# Altium PCB PCB1.PcbDoc
Units mil, origin at the board's own origin, x right, y up, seen from the top; angles counter-clockwise.
Board outline 7009 x 4064 mil, 2 copper layers (Top Layer, Bottom Layer), stack 60.4 mil thick; 110 components, 214 nets, 706 pads, 0 vias.
Unrouted connection lines stored in the file: 459.
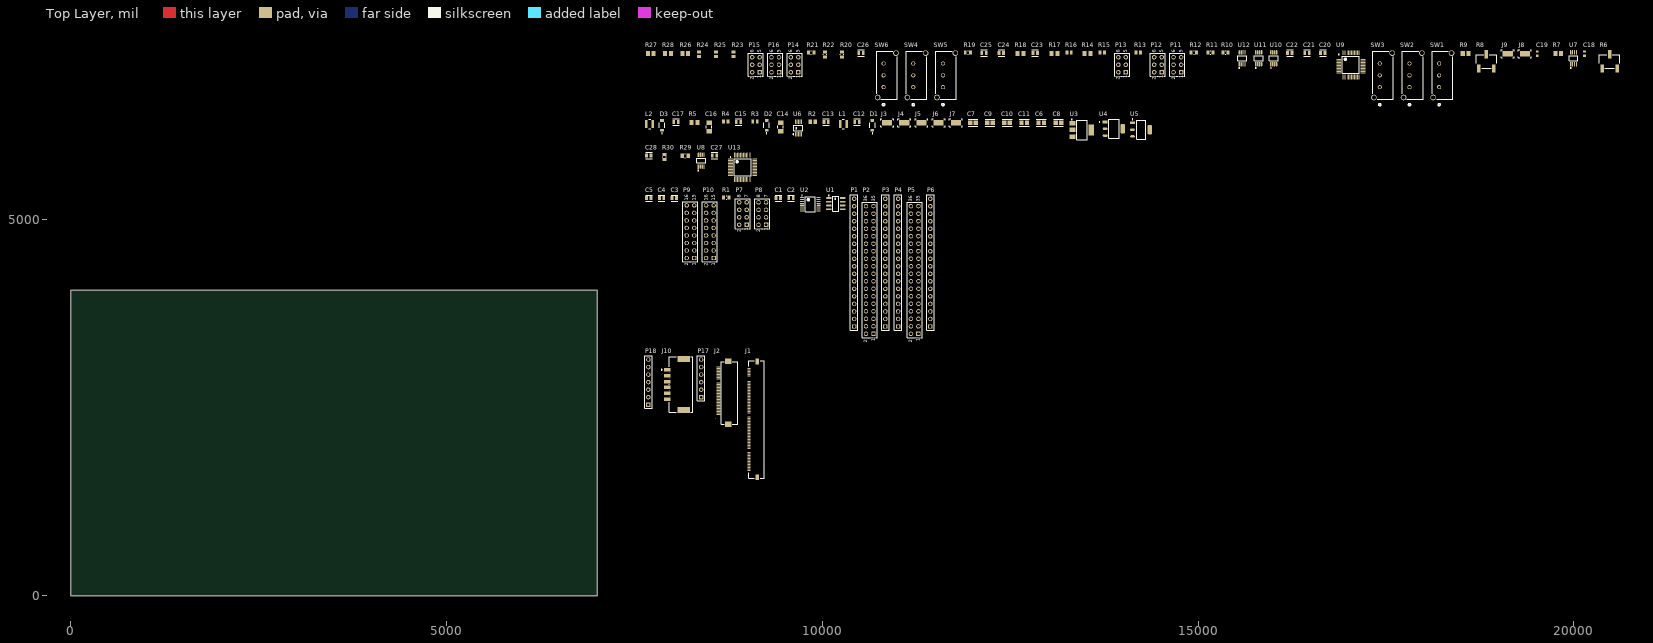
[diagram p0: Top Layer view]
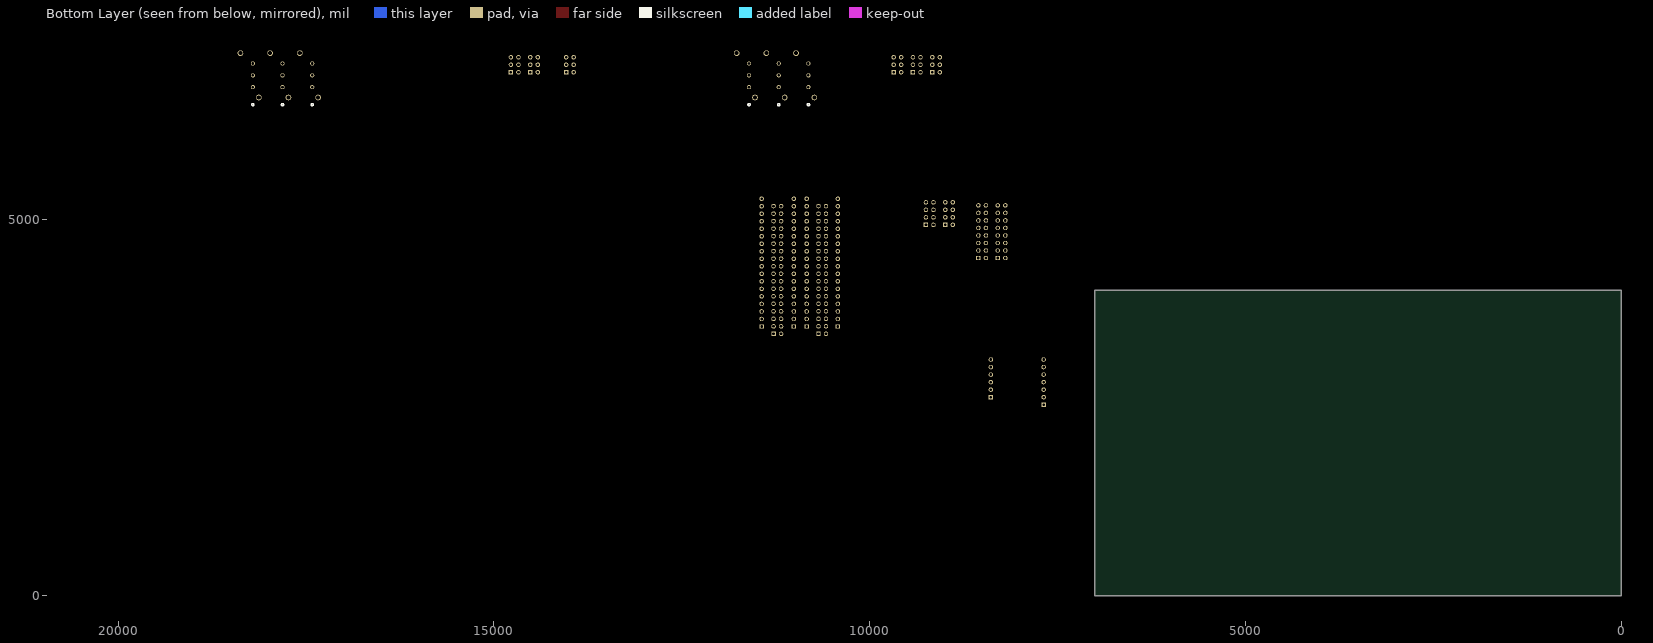
[diagram p1: Bottom Layer view, seen from below]

## Layer stack, top to bottom
Top Solder: solder mask 0.5, Solder Resist, Dk 3.3
Top Layer: signal copper 0.7
Dielectric1: core 59, FR-4, Dk 4.3
Bottom Layer: signal copper 0.7
Bottom Solder: solder mask 0.5, Solder Resist, Dk 3.3

## Board outline
0,0 7009,0 7009,4064 0,4064

## Design rules (kind name [scope] priority, off if disabled: settings)
Clearance [All] p1: gap=10 ignorepadtopadclearanceinfootprint=FALSE
DiffPairsRouting [All] p1: maxlimit=10 minlimit=10 mostfreqgap=10 toplayer_minwidth=10 toplayer_maxwidth=10 toplayer_prefwidth=10 bottomlayer_minwidth=10 bottomlayer_maxwidth=10 bottomlayer_prefwidth=10 maxuncoupledlength=500
HoleSize [All] p1: absolutevalues=TRUE maxlimit=300 minlimit=10 maxpercent=80.000 minpercent=20.000
MinimumAnnularRing [All] p1: minimumring=10
PasteMaskExpansion [All] p1: expansion=10
PlaneClearance [All] p1: clearance=15
PlaneConnect [All] p1: pad.planeconnectstyle=Relief pad.reliefexpansion=20 pad.reliefentries=4 pad.reliefconductorwidth=10 pad.reliefairgap=10 via.planeconnectstyle=Direct via.reliefexpansion=20 via.reliefentries=4 via.reliefconductorwidth=10 via.reliefairgap=10
PolygonConnect [All] p1: thpad.connectstyle=Relief thpad.reliefconductorwidth=10 thpad.reliefentries=4 thpad.polygonreliefangle="90 Angle" thpad.airgapwidth=10 smdpad.connectstyle=Relief smdpad.reliefconductorwidth=10 smdpad.reliefentries=4 smdpad.polygonreliefangle="90 Angle" smdpad.airgapwidth=10 via.connectstyle=Direct via.reliefconductorwidth=10 via.reliefentries=4 via.polygonreliefangle="90 Angle" via.airgapwidth=10
RoomDefinition U_Transmit [InComponentClass('U_Transmit')] p1: confinementstyle=ConfineIn formatcopy=TRUE lockcomponents=FALSE outline 7627,6505 20625,6505 20625,7373 7627,7373
RoomDefinition U_Power [InComponentClass('U_Power')] p2: confinementstyle=ConfineIn formatcopy=TRUE lockcomponents=FALSE outline 7627,6060 14402,6060 14402,6455 7627,6455
RoomDefinition U_Measure [InComponentClass('U_Measure')] p3: confinementstyle=ConfineIn formatcopy=TRUE lockcomponents=FALSE outline 7627,5492 9149,5492 9149,6010 7627,6010
RoomDefinition U_ESP32+ADC+DAC [InComponentClass('U_ESP32+ADC+DAC')] p4: confinementstyle=ConfineIn formatcopy=TRUE lockcomponents=FALSE outline 7627,3352 11510,3352 11510,5442 7627,5442
RoomDefinition U_Connectors [InComponentClass('U_Connectors')] p5: confinementstyle=ConfineIn formatcopy=TRUE lockcomponents=FALSE outline 7627,1490 9277,1490 9277,3302 7627,3302
RoutingVias [All] p1: holewidth=10 width=20 viastyle="Through Hole" minholewidth=10 minwidth=20 maxholewidth=10 maxwidth=20
SMDNeckDown [All] p1: percent=100.000
SilkToSolderMaskClearance SilkscreenOverComponentPads [IsPad] p1: minsilkscreentomaskgap=10 clearancetoexposedcopper=TRUE
SolderMaskExpansion [All] p1: expansion=10 istentingtop=FALSE
Width [All] p1: maxlimit=10 minlimit=10 preferedwidth=10
24 further rules are at their usual default settings.

## Classes and differential pairs
net class VGS_RAW[1..6]: VGS_RAW1 VGS_RAW2 VGS_RAW3 VGS_RAW4 VGS_RAW5 VGS_RAW6
net class VDS[1..32]: VDS1 VDS2 VDS3 VDS4 VDS5 VDS6 VDS7 VDS8 VDS9 VDS10 VDS11 VDS12 VDS13 VDS14 VDS15 VDS16 VDS17 VDS18 VDS19 VDS20 VDS21 VDS22 VDS23 VDS24 VDS25 VDS26 VDS27 VDS28 VDS29 VDS30 VDS31 VDS32
net class SOURCE_SEL[0..4]: SOURCE_SEL0 SOURCE_SEL1 SOURCE_SEL2 SOURCE_SEL3 SOURCE_SEL4
net class IDS[1..32]: IDS1 IDS2 IDS3 IDS4 IDS5 IDS6 IDS7 IDS8 IDS9 IDS10 IDS11 IDS12 IDS13 IDS14 IDS15 IDS16 IDS17 IDS18 IDS19 IDS20 IDS21 IDS22 IDS23 IDS24 IDS25 IDS26 IDS27 IDS28 IDS29 IDS30 IDS31 IDS32
net class GATE[1..6]: GATE1 GATE2 GATE3 GATE4 GATE5 GATE6
net class DRAIN_SEL[0..4]: DRAIN_SEL0 DRAIN_SEL1 DRAIN_SEL2 DRAIN_SEL3 DRAIN_SEL4
component class U_Transmit: C18 C19 C20 C21 C22 C23 C24 C25 C26 J8 J9 P11 P12 P13 P14 P15 P16 R6 R7 R8 R9 R10 R11 R12 R13 R14 R15 R16 R17 R18 R19 R20 R21 R22 R23 R24 R25 R26 R27 R28 SW1 SW2 SW3 SW4 SW5 SW6 U7 U9 U10 U11 U12
component class U_Power: C6 C7 C8 C9 C10 C11 C12 C13 C14 C15 C16 C17 D1 D2 D3 J3 J4 J5 J6 J7 L1 L2 R2 R3 R4 R5 U3 U4 U5 U6
component class U_Measure: C27 C28 R29 R30 U8 U13
component class U_ESP32+ADC+DAC: C1 C2 C3 C4 C5 P1 P2 P3 P4 P5 P6 P7 P8 P9 P10 R1 U1 U2
component class U_Connectors: J1 J2 J10 P17 P18

## Components (designator, comment, footprint, x,y, rotation, side; value= is the part's Value field where it differs from the comment)
C1 "100 nF" FP-C0805C-DN-MFG 9415,5290 r0 top value="0.10 μF"
C2 "100 nF" FP-C0805C-DN-MFG 9584,5290 r0 top value="0.10 μF"
C3 "100 nF" FP-C0805C-DN-MFG 8032,5290 r0 top value="0.10 μF"
C4 "100 nF" FP-C0805C-DN-MFG 7862,5290 r0 top value="0.10 μF"
C5 "100 nF" FP-C0805C-DN-MFG 7692,5290 r0 top value="0.10 μF"
C6 "10 uF" FP-CL21-IPC_A 12915,6295 r0 top
C7 "10 uF" FP-CL21-IPC_A 12005,6295 r0 top
C8 "10 uF" FP-CL21-IPC_A 13143,6295 r0 top
C9 "10 uF" FP-CL21-IPC_A 12233,6295 r0 top
C10 "10 uF" FP-CL21-IPC_A 12460,6295 r0 top
C11 "10 uF" FP-CL21-IPC_A 12688,6295 r0 top
C12 "100 nF" FP-C0805C-DN-MFG 10463,6303 r0 top value="0.10 μF"
C13 "100 pF" FP-C0805C-DN-MFG 10051,6303 r0 top
C14 "1uF" FP-1206-L_3_2_0_15-W_1_6-IPC_A 9446,6238 r90 top
C15 "4.7 uF" FP-C0805C475K3PACTU-MFG 8885,6302 r0 top
C16 "1uF" FP-1206-L_3_2_0_15-W_1_6-IPC_A 8496,6238 r90 top
C17 "100 pF" FP-C0805C-DN-MFG 8054,6303 r0 top
C18 "100 nF" 1608[0603] 20142,7214 r90 top
C19 "100 nF" 1608[0603] 19516,7214 r90 top
C20 "100 nF" FP-C0805C-DN-MFG 16661,7221 r0 top value="0.10 μF"
C21 "100 nF" FP-C0805C-DN-MFG 16451,7221 r0 top value="0.10 μF"
C22 "100 nF" FP-C0805C-DN-MFG 16221,7221 r0 top value="0.10 μF"
C23 "100 nF" FP-C0805C-DN-MFG 12833,7221 r0 top value="0.10 μF"
C24 "100 nF" FP-C0805C-DN-MFG 12382,7221 r0 top value="0.10 μF"
C25 "100 nF" FP-C0805C-DN-MFG 12152,7221 r0 top value="0.10 μF"
C26 "100 nF" FP-C0805C-DN-MFG 10516,7221 r0 top value="0.10 μF"
C27 "100 nF" FP-C0805C-DN-MFG 8566,5858 r0 top value="0.10 μF"
C28 "100 nF" FP-C0805C-DN-MFG 7692,5858 r0 top value="0.10 μF"
D1 "MBR0530" FP-425-04-MFG 10667,6259 r90 top
D2 "MBR0530" FP-425-04-MFG 9259,6259 r90 top
D3 "MBR0530" FP-425-04-MFG 7868,6259 r90 top
J1 "5051107091" 5051107091 9134,2346 r90 top
J2 "FH12-36S-0.5SH_55_" FH1236S05SH55 8749,2700 r90 top
J3 "5015" FP-5015-MFG 10863,6293 r0 top
J4 "5015" FP-5015-MFG 11091,6293 r0 top
J5 "5015" FP-5015-MFG 11320,6293 r0 top
J6 "5015" FP-5015-MFG 11549,6293 r0 top
J7 "5015" FP-5015-MFG 11778,6293 r0 top
J8 "5015" FP-5015-MFG 19349,7211 r0 top
J9 "5015" FP-5015-MFG 19121,7211 r0 top
J10 "5600200620" FP-5600200620-MFG 8119,2811 r90 top
L1 "LQH3NPN100MMEL" FP-LQH3NPH_ME-MFG 10282,6279 r0 top
L2 "LQH3NPN100MMEL" FP-LQH3NPH_ME-MFG 7703,6279 r0 top
P1 "Header 18" HDR1X18 10424,3583 r90 top
P2 "Header 18X2" HDR2X18 10682,3485 r90 top
P3 "Header 18" HDR1X18 10839,3583 r90 top
P4 "Header 18" HDR1X18 11010,3583 r90 top
P5 "Header 18X2" HDR2X18 11280,3485 r90 top
P6 "Header 18" HDR1X18 11438,3583 r90 top
P7 "Header 4X2" HDR2X4 8994,4935 r90 top
P8 "Header 4X2" HDR2X4 9252,4935 r90 top
P9 "Header 8X2" HDR2X8 8296,4494 r90 top
P10 "Header 8X2" HDR2X8 8554,4494 r90 top
P11 "Header 3X2" HDR2X3 14775,6966 r90 top
P12 "Header 3X2" HDR2X3 14517,6966 r90 top
P13 "Header 3X2" HDR2X3 14040,6966 r90 top
P14 "Header 3X2" HDR2X3 9682,6966 r90 top
P15 "Header 3X2" HDR2X3 9167,6966 r90 top
P16 "Header 3X2" HDR2X3 9425,6966 r90 top
P17 "Header 6" HDR1X6 8388,2643 r90 top
P18 "Header 7" HDR1X7 7686,2543 r90 top
R1 "10k" RESC2013X60X35NL10T20 8724,5298 r0 top
R2 "365k" RESC2013X70X40NL20T20 9874,6309 r0 top
R3 "24.9k" RESC2013X70X40LL20T20 9105,6313 r0 top
R4 "24.9k" RESC2013X70X40LL20T20 8715,6313 r0 top
R5 "380k" RESC2013X70X40ML20T20 8300,6297 r0 top
R6 "3269W-1-104LF" FP-3269W-MFG 20477,7110 r0 top value=100kΩ
R7 "12k" RESC2013X60X40ML20T25 19794,7215 r0 top
R8 "3269W-1-104LF" FP-3269W-MFG 18838,7110 r0 top value=100kΩ
R9 "12k" RESC2013X60X40ML20T25 18560,7215 r0 top
R10 "10k" RESC2013X60X35NL10T20 15366,7229 r0 top
R11 "10k" RESC2013X60X35NL10T20 15166,7229 r0 top
R12 "10k" RESC2013X60X35NL10T20 14945,7229 r0 top
R13 "91k" RESC2013X60X40LL20T25 14203,7231 r0 top
R14 "191k" RESC2013X70X40ML20T20 13530,7215 r0 top
R15 "91k" RESC2013X60X40LL20T25 13725,7231 r0 top
R16 "91k" RESC2013X60X40LL20T25 13284,7231 r0 top
R17 "191k" RESC2013X70X40ML20T20 13089,7215 r0 top
R18 "191k" RESC2013X70X40ML20T20 12638,7215 r0 top
R19 "10k" RESC2013X60X35NL10T20 11938,7229 r0 top
R20 "10k" RESC2013X60X35NL10T20 10265,7202 r90 top
R21 "10k" RESC2013X60X35NL10T20 9852,7229 r0 top
R22 "10k" RESC2013X60X35NL10T20 10035,7202 r90 top
R23 "91k" RESC2013X60X40LL20T25 8819,7208 r90 top
R24 "91k" RESC2013X60X40LL20T25 8359,7208 r90 top
R25 "91k" RESC2013X60X40LL20T25 8589,7208 r90 top
R26 "191k" RESC2013X70X40ML20T20 8178,7215 r0 top
R27 "191k" RESC2013X70X40ML20T20 7718,7215 r0 top
R28 "191k" RESC2013X70X40ML20T20 7948,7215 r0 top
R29 "1k" RESC2013X60X35ML10T20 8176,5854 r0 top
R30 "10k" RESC2013X60X35NL10T20 7901,5839 r90 top
SW1 "1825255-1" SW3_1825255-1_TEC 18209,6768 r90 top
SW2 "1825255-1" SW3_1825255-1_TEC 17814,6768 r90 top
SW3 "1825255-1" SW3_1825255-1_TEC 17419,6768 r90 top
SW4 "1825255-1" SW3_1825255-1_TEC 11211,6768 r90 top
SW5 "1825255-1" SW3_1825255-1_TEC 11606,6768 r90 top
SW6 "1825255-1" SW3_1825255-1_TEC 10816,6768 r90 top
U1 "MCP3201-CI/SN" SOIC-SN8_L 10180,5218 r0 top
U2 "AD5328BRUZ" RU-16_L 9842,5209 r0 top
U3 "NCP1117ST20T3G" ONSC-SOT-223-4-318H-01_A_V 13455,6198 r0 top
U4 "LDL1117S33R" FP-SOT223-0046067-IPC_C 13882,6214 r0 top
U5 "AP7365-10EG-13" FP-SOT223-IPC_C 14243,6202 r0 top
U6 "LT1945EMS#PBF" LT-MS-10_N 9682,6224 r90 top
U7 "ADA4522-2ARMZ" FP-RM-8-IPC_C 19997,7152 r90 top
U8 "ADA4522-2ARMZ" FP-RM-8-IPC_C 8389,5789 r90 top
U9 "ADG732BSUZ-REEL" ADI-SU-48_N 17035,7064 r0 top
U10 "ADA4522-2ARMZ" FP-RM-8-IPC_C 16008,7152 r90 top
U11 "ADA4522-2ARMZ" FP-RM-8-IPC_C 15808,7152 r90 top
U12 "ADA4522-2ARMZ" FP-RM-8-IPC_C 15587,7152 r90 top
U13 "ADG732BSUZ-REEL" ADI-SU-48_N 8940,5701 r0 top

## Footprints (in the part's own frame and the unit in brackets; to place one, negate y for a bottom-side part, rotate by r counter-clockwise, add the part's x,y. Pads: shape width x height; smd on the part's side, far side on the other; paste and mask are expansions set on the pad)
1608[0603] [mm] "Chip Capacitor, Body 1.6x0.8mm, IPC High Density"
  rect 0.8x0.9 smd: 1(-0.7,0) 2(0.7,0)
  body extent -0.87,-0.48 0.87,0.48, height 1.3
5051107091 [mm]
  rect 0.3x1 smd: 1(-17.25,2.7) 2(-16.75,2.7) 3(-16.25,2.7) 4(-15.75,2.7) 5(-15.25,2.7) 6(-14.75,2.7) 7(-14.25,2.7) 8(-13.75,2.7) 9(-13.25,2.7) 10(-12.75,2.7) 11(-12.25,2.7) 12(-11.75,2.7) 13(-11.25,2.7) 14(-10.75,2.7) 15(-10.25,2.7) 16(-9.75,2.7) 17(-9.25,2.7) 18(-8.75,2.7) 19(-8.25,2.7) 20(-7.75,2.7) 21(-7.25,2.7) 22(-6.75,2.7) 23(-6.25,2.7) 24(-5.75,2.7) 25(-5.25,2.7) 26(-4.75,2.7) 27(-4.25,2.7) 28(-3.75,2.7) 29(-3.25,2.7) 30(-2.75,2.7) 31(-2.25,2.7) 32(-1.75,2.7) 33(-1.25,2.7) 34(-0.75,2.7) 35(-0.25,2.7) 36(0.25,2.7) 37(0.75,2.7) 38(1.25,2.7) 39(1.75,2.7) 40(2.25,2.7) 41(2.75,2.7) 42(3.25,2.7) 43(3.75,2.7) 44(4.25,2.7) 45(4.75,2.7) 46(5.25,2.7) 47(5.75,2.7) 48(6.25,2.7) 49(6.75,2.7) 50(7.25,2.7) 51(7.75,2.7) 52(8.25,2.7) 53(8.75,2.7) 54(9.25,2.7) 55(9.75,2.7) 56(10.25,2.7) 57(10.75,2.7) 58(11.25,2.7) 59(11.75,2.7) 60(12.25,2.7) 61(12.75,2.7) 62(13.25,2.7) 63(13.75,2.7) 64(14.25,2.7) 65(14.75,2.7) 66(15.25,2.7) 67(15.75,2.7) 68(16.25,2.7) 69(16.75,2.7) 70(17.25,2.7)
  rect 2x1.3 smd: 71(-19.55,0) 72(19.55,0)
  silkscreen extent -19.85,-2.45 19.85,2.8, body extent -20.25,-2.33 20.25,2.97, height 1.88
ADI-SU-48_N [mm] "QFP, 48-Leads, Body 7x7mm, Pitch 0.5mm, IPC Medium Density"
  oval 1.65x0.3 smd: 1(-4.1,2.75) 2(-4.1,2.25) 3(-4.1,1.75) 4(-4.1,1.25) 5(-4.1,0.75) 6(-4.1,0.25) 7(-4.1,-0.25) 8(-4.1,-0.75) 9(-4.1,-1.25) 10(-4.1,-1.75) 11(-4.1,-2.25) 12(-4.1,-2.75) 25(4.1,-2.75) 26(4.1,-2.25) 27(4.1,-1.75) 28(4.1,-1.25) 29(4.1,-0.75) 30(4.1,-0.25) 31(4.1,0.25) 32(4.1,0.75) 33(4.1,1.25) 34(4.1,1.75) 35(4.1,2.25) 36(4.1,2.75)
  oval 0.3x1.65 smd: 13(-2.75,-4.1) 14(-2.25,-4.1) 15(-1.75,-4.1) 16(-1.25,-4.1) 17(-0.75,-4.1) 18(-0.25,-4.1) 19(0.25,-4.1) 20(0.75,-4.1) 21(1.25,-4.1) 22(1.75,-4.1) 23(2.25,-4.1) 24(2.75,-4.1) 37(2.75,4.1) 38(2.25,4.1) 39(1.75,4.1) 40(1.25,4.1) 41(0.75,4.1) 42(0.25,4.1) 43(-0.25,4.1) 44(-0.75,4.1) 45(-1.25,4.1) 46(-1.75,4.1) 47(-2.25,4.1) 48(-2.75,4.1)
  silkscreen extent -4.22,-2.88 2.88,3.57, body extent -3.5,-3.5 3.5,3.5, height 1.2
FH1236S05SH55 [mm]
  rect 0.3x1.3 smd: 1(-8.75,3.25) 2(-8.25,3.25) 3(-7.75,3.25) 4(-7.25,3.25) 5(-6.75,3.25) 6(-6.25,3.25) 7(-5.75,3.25) 8(-5.25,3.25) 9(-4.75,3.25) 10(-4.25,3.25) 11(-3.75,3.25) 12(-3.25,3.25) 13(-2.75,3.25) 14(-2.25,3.25) 15(-1.75,3.25) 16(-1.25,3.25) 17(-0.75,3.25) 18(-0.25,3.25) 19(0.25,3.25) 20(0.75,3.25) 21(1.25,3.25) 22(1.75,3.25) 23(2.25,3.25) 24(2.75,3.25) 25(3.25,3.25) 26(3.75,3.25) 27(4.25,3.25) 28(4.75,3.25) 29(5.25,3.25) 30(5.75,3.25) 31(6.25,3.25) 32(6.75,3.25) 33(7.25,3.25) 34(7.75,3.25) 35(8.25,3.25) 36(8.75,3.25)
  rect 1.8x2.2 smd: MP1(-10.65,0) MP2(10.65,0)
  silkscreen extent -10.55,-3.2 10.55,4.45
FP-425-04-MFG [mil]
  rect 36x48 smd paste+0 mask+0: 1(-64.5,0) 2(64.5,0)
  silkscreen extent -110,-35 32,35, body extent -86,-39 86,39, height 10
FP-1206-L_3_2_0_15-W_1_6-IPC_A [mil]
  rect 61.24x73.16 smd paste+0 mask+0: 1(-57.14,0) 2(57.14,0)
  silkscreen extent -15,-37 15,37, body extent -107,-56 107,56, height 10
FP-3269W-MFG [mm]
  rect 1.19x2.79 smd paste+0 mask+0: 1(-2.54,-2.415) 2(0,2.415) 3(2.54,-2.415)
  silkscreen extent -3.43,-2.28 3.43,2.28, body extent -3.53,-3.91 3.53,3.91, height 0.25
FP-5015-MFG [mm]
  rect 3.43x1.78 smd paste+0 mask+0: 1(0,0)
  silkscreen extent -2.16,-1.34 2.17,1.34
FP-5600200620-MFG [mm]
  rect 1.2x2.2 smd paste+0 mask+0: 1(5,4.68) 2(3,4.68) 3(1,4.68) 4(-1,4.68) 5(-3,4.68) 6(-5,4.68)
  rect 2x4.2 smd paste+0 mask+0: 7(-8.6,-0.9) 8(8.6,-0.9)
  silkscreen extent -9.43,-4 9.43,6.63, body extent -9.7,-4.1 9.7,5.88, height 0.25
FP-C0805C475K3PACTU-MFG [mm]
  rect 0.95x1.35 smd paste+0 mask+0: 1(-0.75,0) 2(0.75,0)
  silkscreen extent -1.1,-1.1 1.1,1.1, body extent -1.4,-0.85 1.4,0.85, height 0.25
FP-C0805C-DN-MFG [mm]
  rect 0.95x1.35 smd paste+0 mask+0: 1(-0.75,0) 2(0.75,0)
  silkscreen extent -1.1,-1.07 1.1,1.07, body extent -1.4,-0.85 1.4,0.85, height 0.25
FP-CL21-IPC_A [mil]
  rect 57.27x61.27 smd paste+0 mask+0: 1(-36.45,0) 2(36.45,0)
  silkscreen extent -65,-46 65,46, body extent -85,-50 85,50, height 10
FP-LQH3NPH_ME-MFG [mm]
  rect 0.8x2.7 smd paste+0 mask+0: 1(-1.1,0) 2(1.1,0)
  silkscreen extent -0.33,-1.6 0.33,1.6, body extent -1.7,-1.7 1.7,1.7, height 0.25
FP-RM-8-IPC_C [mm]
  rect 1.454x0.436 smd paste+0 mask+0: 1(-2,0.975)
  rrect100% 1.454x0.436 smd paste+0 mask+0: 2(-2,0.325) 3(-2,-0.325) 4(-2,-0.975) 5(2,-0.975) 6(2,-0.325) 7(2,0.325) 8(2,0.975)
  silkscreen extent -3.43,-1.5 0.77,1.5
FP-SOT223-0046067-IPC_C [mm]
  rect 1.604x0.88 smd paste+0 mask+0: 1(-3,2.3)
  rrect100% 1.604x0.88 smd paste+0 mask+0: 2(-3,0) 3(-3,-2.3)
  rrect55% 1.604x3.18 smd paste+0 mask+0: 4(3,0)
  silkscreen extent -5.05,-3.25 1.75,3.25, body extent -3.9,-3.35 3.9,3.35, height 0.25
FP-SOT223-IPC_C [mm]
  rect 1.56x0.832 smd paste+0 mask+0: 1(-2.926,2.3)
  rrect100% 1.56x0.832 smd paste+0 mask+0: 2(-2.926,0) 3(-2.926,-2.3)
  rrect53% 1.56x3.132 smd paste+0 mask+0: 4(2.926,0)
  silkscreen extent -3.05,-3.25 1.5,3.62, body extent -3.81,-3.35 3.81,3.35, height 0.25
HDR1X6 [mm] "Connector; Header; 6 Position"
  rect 1.5x1.5 hole 0.9: 1(0,0)
  round 1.5 hole 0.9: 2(2.54,0) 3(5.08,0) 4(7.62,0) 5(10.16,0) 6(12.7,0)
  silkscreen extent -1.27,-1.27 13.97,1.27
HDR1X7 [mm] "Connector; Header; 7 Position"
  rect 1.5x1.5 hole 0.9: 1(0,0)
  round 1.5 hole 0.9: 2(2.54,0) 3(5.08,0) 4(7.62,0) 5(10.16,0) 6(12.7,0) 7(15.24,0)
  silkscreen extent -1.27,-1.27 16.51,1.27
HDR1X18 [mm] "Connector; Header; 18 Position"
  rect 1.5x1.5 hole 0.9: 1(0,0)
  round 1.5 hole 0.9: 2(2.54,0) 3(5.08,0) 4(7.62,0) 5(10.16,0) 6(12.7,0) 7(15.24,0) 8(17.78,0) 9(20.32,0) 10(22.86,0) 11(25.4,0) 12(27.94,0) 13(30.48,0) 14(33.02,0) 15(35.56,0) 16(38.1,0) 17(40.64,0) 18(43.18,0)
  silkscreen extent -1.27,-1.27 44.45,1.27
HDR2X3 [mm] "Connector; Header; 3x2 Position"
  rect 1.5x1.5 hole 0.9: 1(0,0)
  round 1.5 hole 0.9: 2(0,2.54) 3(2.54,0) 4(2.54,2.54) 5(5.08,0) 6(5.08,2.54)
  silkscreen extent -1.27,-1.27 6.35,3.81
HDR2X4 [mm] "Connector; Header; 4x2 Position"
  rect 1.5x1.5 hole 0.9: 1(0,0)
  round 1.5 hole 0.9: 2(0,2.54) 3(2.54,0) 4(2.54,2.54) 5(5.08,0) 6(5.08,2.54) 7(7.62,0) 8(7.62,2.54)
  silkscreen extent -1.27,-1.27 8.89,3.81
HDR2X8 [mm] "Connector; Header; 8x2 Position"
  rect 1.5x1.5 hole 0.9: 1(0,0)
  round 1.5 hole 0.9: 2(0,2.54) 3(2.54,0) 4(2.54,2.54) 5(5.08,0) 6(5.08,2.54) 7(7.62,0) 8(7.62,2.54) 9(10.16,0) 10(10.16,2.54) 11(12.7,0) 12(12.7,2.54) 13(15.24,0) 14(15.24,2.54) 15(17.78,0) 16(17.78,2.54)
  silkscreen extent -1.27,-1.27 19.05,3.81
HDR2X18 [mm] "Connector; Header; 18x2 Position"
  rect 1.5x1.5 hole 0.9: 1(0,0)
  round 1.5 hole 0.9: 2(0,2.54) 3(2.54,0) 4(2.54,2.54) 5(5.08,0) 6(5.08,2.54) 7(7.62,0) 8(7.62,2.54) 9(10.16,0) 10(10.16,2.54) 11(12.7,0) 12(12.7,2.54) 13(15.24,0) 14(15.24,2.54) 15(17.78,0) 16(17.78,2.54) 17(20.32,0) 18(20.32,2.54) 19(22.86,0) 20(22.86,2.54) 21(25.4,0) 22(25.4,2.54) 23(27.94,0) 24(27.94,2.54) 25(30.48,0) 26(30.48,2.54) 27(33.02,0) 28(33.02,2.54) 29(35.56,0) 30(35.56,2.54) 31(38.1,0) 32(38.1,2.54) 33(40.64,0) 34(40.64,2.54) 35(43.18,0) 36(43.18,2.54)
  silkscreen extent -1.27,-1.27 44.45,3.81
LT-MS-10_N [mm] "SOP, 10-Leads, Body 3.1x3.1mm, Pitch 0.5mm, IPC Medium Density"
  oval 1.6x0.3 smd: 1(-2.125,1) 2(-2.125,0.5) 3(-2.125,0) 4(-2.125,-0.5) 5(-2.125,-1) 6(2.125,-1) 7(2.125,-0.5) 8(2.125,0) 9(2.125,0.5) 10(2.125,1)
  silkscreen extent -2.25,-1.55 0.92,1.82, body extent -1.55,-1.55 1.55,1.55, height 1.1
ONSC-SOT-223-4-318H-01_A_V [mm] "SOT223, 4-Leads, Body 6.5x3.5mm, Pitch 2.3mm"
  rect 2x1.5 smd: 1(-3.15,2.3) 2(-3.15,0) 3(-3.15,-2.3)
  rect 2x3.8 smd: 4(3.15,0)
  silkscreen extent -3.55,-3.25 1.75,3.72, body extent -1.75,-3.25 1.75,3.25, height 1.8
RESC2013X60X35ML10T20 [mm] "Chip Resistor, 2-Leads, Body 2.1x1.35mm, IPC Low Density"
  rect 1.2x1.45 smd: 1(-1,0) 2(1,0)
  silkscreen extent -0.1,-0.63 0.1,0.63, body extent -1.05,-0.68 1.05,0.67, height 0.6
RESC2013X60X35NL10T20 [mm] "Chip Resistor, 2-Leads, Body 2.1x1.35mm, IPC Medium Density"
  rect 1x1.35 smd: 1(-0.9,0) 2(0.9,0)
  silkscreen extent -0.1,-0.58 0.1,0.58, body extent -1.05,-0.68 1.05,0.67, height 0.6
RESC2013X60X40LL20T25 [mm] "Chip Resistor, 2-Leads, Body 2.00x1.25mm, IPC High Density"
  rect 1x1.35 smd: 1(-0.75,0) 2(0.75,0)
  body extent -1.1,-0.72 1.1,0.72, height 0.6
RESC2013X60X40ML20T25 [mm] "Chip Resistor, 2-Leads, Body 2.00x1.25mm, IPC Low Density"
  rect 1.4x1.55 smd: 1(-0.95,0) 2(0.95,0)
  body extent -1.1,-0.72 1.1,0.72, height 0.6
RESC2013X70X40LL20T20 [mm] "Chip Resistor, 2-Leads, Body 2.00x1.25mm, IPC High Density"
  rect 0.95x1.35 smd: 1(-0.775,0) 2(0.775,0)
  body extent -1.1,-0.72 1.1,0.72, height 0.7
RESC2013X70X40ML20T20 [mm] "Chip Resistor, 2-Leads, Body 2.00x1.25mm, IPC Low Density"
  rect 1.35x1.55 smd: 1(-0.975,0) 2(0.975,0)
  body extent -1.1,-0.72 1.1,0.72, height 0.7
RESC2013X70X40NL20T20 [mm] "Chip Resistor, 2-Leads, Body 2.00x1.25mm, IPC Medium Density"
  rect 1.15x1.45 smd: 1(-0.875,0) 2(0.875,0)
  body extent -1.1,-0.72 1.1,0.72, height 0.7
RU-16_L [mm] "TSOP, 16-Leads, Body 5x4.4mm, Pitch 0.65mm, IPC High Density"
  oval 1.4x0.35 smd: 1(-2.8,2.275) 2(-2.8,1.625) 3(-2.8,0.975) 4(-2.8,0.325) 5(-2.8,-0.325) 6(-2.8,-0.975) 7(-2.8,-1.625) 8(-2.8,-2.275) 9(2.8,-2.275) 10(2.8,-1.625) 11(2.8,-0.975) 12(2.8,-0.325) 13(2.8,0.325) 14(2.8,0.975) 15(2.8,1.625) 16(2.8,2.275)
  silkscreen extent -2.92,-2.55 1.7,3.12, body extent -2.25,-2.55 2.25,2.55, height 1.2
SOIC-SN8_L [mm] "SOIC, 8-Leads, Body 4.9x3.9mm, Pitch 1.27mm, IPC High Density"
  oval 1.9x0.6 smd: 1(-2.35,1.905) 2(-2.35,0.635) 3(-2.35,-0.635) 4(-2.35,-1.905) 5(2.35,-1.905) 6(2.35,-0.635) 7(2.35,0.635) 8(2.35,1.905)
  silkscreen extent -2.47,-2.5 1,2.88, body extent -2,-2.5 2,2.5, height 1.75
SW3_1825255-1_TEC [mil]
  round 55 hole 35 mask+0: 1(0,0) 2(157,0) 3(314,0)
  round 75 hole 55: 4(-138,79) 5(452,-165)
  silkscreen extent -248,-180 477,94, body extent -160,-177 470,87, height 477

## Part data
C1 C2 C3 C4 C5 C12 C20 C21 C22 C23 C24 C25 C26 C27 C28: library part CMP-2007-00279-2, "CAP CER 0.1UF 50V X7R 0805", Capacitance="0.10 μF", Manufacturer=KEMET, Manufacturer Part Number=C0805C104K5RACTU, Package=C0805C-DN, Temperature="-55°C to +125°C", Temperature Characteristic=X7R, Temperature Coefficient=30ppm/°C, Temperature Range High=+125°C, Temperature Range Low=-55°C, Tolerance=0.1, Voltage Rating="50 V", Automotive=No, Category=Cap, ComponentLink2Description=Datasheet, ComponentLink2URL=https://content.kemet.com/datasheets/KEM_C1003_C0G_SMD.pdf, Device Class L1="Passive Components", Device Class L2=Capacitors, Device Class L3="Ceramic Capacitors", Digikey Description="CAP CER 0.1UF 50V X7R 0805", Height=0.88mm, Ipc Land Pattern Name=CAPC200125X78, Lead Free=Yes, Material=Ceramic, Mouser Description="Cap Ceramic 0.1uF 50V X7R 10% SMD 2.0 x 1.2 mm 125 C Paper T/R", Octopart=https://octopart.com/c0805c104k5ractu-kemet-143926, RoHS=TRUE
C6 C7 C8 C9 C10 C11: library part CMP-13271-002975-1, "CL21 Series 0805 10uF 25V ±10% Tolerance X5R Multilayer Ceramic Chip Capacitor", Capacitance=10uF, Case Code (Imperial)=0805, Case Code (Metric)=2012, Dielectric=X5R, Max Operating Temperature=85°C, Min Operating Temperature=-55°C, Package Quantity=1, Tolerance=10%, Voltage Rating=25V, Case/Package=0805, Depth=1.25mm, Height=1.25mm, Length=2mm, Mount="Surface Mount", Packaging="Tape and Reel", Radiation Hardening=No, Thickness=0.057inch, Width=0.049inch
C13 C17: library part CMP-03020-030378-1, "CAP CER 100PF 25V X7R 0805", Manufacturer=KEMET, Manufacturer Part Number=C0805C101K3RACTU, Package=C0805C-DN, Temperature="-55°C to +125°C", Temperature Characteristic=X7R, Temperature Coefficient=30ppm/°C, Temperature Range High=+125°C, Temperature Range Low=-55°C, Tolerance=0.1, Voltage Rating="25 V", Automotive=No, Capacitance="100 pF", Category=Cap, ComponentLink2Description=Datasheet, ComponentLink2URL=https://content.kemet.com/datasheets/KEM_C1003_C0G_SMD.pdf, Device Class L1="Passive Components", Device Class L2=Capacitors, Device Class L3="Ceramic Capacitors", Digikey Description="CAP CER 100PF 25V X7R 0805", Height=0.88mm, Ipc Land Pattern Name=CAPC200125X78, Lead Free=Yes, Material=Ceramic, Octopart=https://octopart.com/c0805c101k3ractu-kemet-89187426, RoHS=TRUE
C14 C16: library part CMP-14477-003409-2, "None", Case Code (Imperial)=1206, Case Code (Metric)=3216, Dielectric=X5R, Max Operating Temperature=85°C, Min Operating Temperature=-55°C, Package Quantity=1, Resistor Type=Ceramic, Tolerance=10%, Voltage=25V, Capacitance=1uF, Case/Package=1206, Construction=Flat, Depth=1.6mm, Halogen Free="Halogen Free", Height=0.85mm, Lead Free="Lead Free", Length=3.2mm, Mount="Surface Mount", Number of Pins=2, Packaging="Tape and Reel", Radiation Hardening=No, RoHS Compliant=Yes, Series=M, Termination=SMD/SMT, Thickness=0.037inch, Voltage Rating=25V, Voltage Rating (DC)=25V, Width=0.063inch
C15: library part CMP-2007-01010-2, "CAP CER 4.7UF 25V X5R 0805", Capacitance=4.7uF, Case Code (Imperial)=0805, Case Code (Metric)=2012, Dielectric=X5R, Dielectric Material=Ceramic, Max Operating Temperature=85°C, Min Operating Temperature=-55°C, Package Quantity=2500, Tolerance=10%, Voltage=25V, Case/Package=0805, Construction=Flat, Contact Plating=Tin, Depth=1.25mm, Dissipation Factor=5%, Height=1.25mm, Lead Free="Lead Free", Length=2mm, Mount=PCB, Number of Pins=2, Packaging="Tape and Reel", Radiation Hardening=No, REACH SVHC="No SVHC", RoHS Compliant=Yes, Series=C0805C, Termination=SMD/SMT, Voltage Rating (DC)=25V, Width=1.2mm
C18 C19: library part "Cap Semi", LatestRevisionDate=29-May-2009, LatestRevisionNote="IPC-7351 Footprint Added.", PackageDescription="Chip Capacitor", PackageReference=C1206, Published=8-Jun-2000, Publisher="Altium Limited"
D1 D2 D3: library part CMP-2000-05113-2, "DIODE SCHOTTKY 30V 500MA SOD123", Average Rectified Current=500mA, Forward Voltage=430mV, Max Forward Surge Current (Ifsm)=5.5A, Max Operating Temperature=150°C, Max Repetitive Reverse Voltage (Vrrm)=30V, Max Reverse Leakage Current=130uA, Min Operating Temperature=-65°C, Package Quantity=1, Contact Plating=Tin, Current Rating=500mA, Element Configuration=Single, Forward Current=500mA, Height=1.03mm, Lead Free="Lead Free", Length=2.7mm, Max Reverse Voltage (DC)=30V, Max Surge Current=5.5A, Mount="Surface Mount", Number of Pins=2, Output Current=500mA, Packaging="Tape and Reel", Peak Non-Repetitive Surge Current=5.5A, Peak Reverse Current=130uA, Polarity=Standard, Radiation Hardening=No, REACH SVHC="No SVHC", Voltage Rating (DC)=30V, Weight=0.03g, Width=1.6mm
J1: "Connector", Manufacturer_Name=Molex, Arrow Part Number=5051107091, Arrow Price/Stock=https://www.arrow.com/en/products/5051107091/molex?region=nac, Datasheet Link=https://www.molex.com/webdocs/datasheets/pdf/en-us/5051107091_FFC_FPC_CONNECTORS.pdf, Height=2.1mm, Manufacturer_Part_Number=5051107091
J2: "Connector", Arrow Part Number=FH12-36S-0.5SH(55), Manufacturer_Name=Hirose, Mouser Part Number=798-FH12-36S-0.5SH55, Arrow Price/Stock=https://www.arrow.com/en/products/fh12-36s-0.5sh-55/hirose-electric, Datasheet Link=https://www.hirose.com/product/document?clcode=CL0586-0526-4-55&productname=FH12-36S-0.5SH(55)&series=FH12&documenttype=2DDrawing&lang=en&documentid=0000987484, Height=2.2mm, Manufacturer_Part_Number=FH12-36S-0.5SH(55), Mouser Price/Stock=https://www.mouser.co.uk/ProductDetail/Hirose-Connector/FH12-36S-05SH55?qs=Ux3WWAnHpjBt9PREjhnzAA%3D%3D
J3 J4 J5 J6 J7 J8 J9: library part CMP-2000-05183-2, "PC TEST POINT MINIATURE", Manufacturer=keystone, Automotive=No, Category=Conn, ComponentLink2Description=Datasheet, ComponentLink2URL=http://www.keyelco.com/product-pdf.cfm?p=1353, Conn Orientation=Straight, Contact Material=Silver, Device Class L1=Connectors, Device Class L2=unset, Device Class L3=unset, Digikey Description="PC TEST POINT MINIATURE", Height=1.65mm, Lead Free=Yes, Manufacturer Part Number=5015, Number Of Contacts=1, Octopart=https://octopart.com/5015-keystone-3822, Package=5015, RoHS=TRUE
J10: library part CMP-04776-000066-1, "CONN HEADER SMD 6POS 2MM", Current Rating=3A, Manufacturer=Molex, Temperature="-40°C to +125°C", Temperature Range High=+125°C, Temperature Range Low=-40°C, Voltage Rating=125V, Automotive=No, Category=Conn, ComponentLink2Description=Datasheet, ComponentLink2URL=https://www.molex.com/webdocs/datasheets/pdf/en-us/5600200320_PCB_HEADERS.pdf, Conn Gender=Male, Conn Orientation=Vertical, Contact Material=Tin,Nickel, Device Class L1=Connectors, Device Class L2="Headers and Wire Housings", Device Class L3=unset, Digikey Description="CONN HEADER SMD 6POS 2MM", Footprint Url=https://www.molex.com/pdm_docs/sd/5600200320_sd.pdf, Height=8.2mm, Lead Free=Yes, Manufacturer Part Number=5600200620, Number Of Contacts=6, Number of Rows=1, Octopart=https://octopart.com/5600200620-molex-51767481, Package=5600200620, Pitch=2mm, RoHS=TRUE
L1 L2: library part CMP-06042-002074-1, "Wire Wound Ferrite Inductor for Power Lines 10μH ±20% 0.228Ω 1280mA 1212", Case Code (Imperial)=1212, Case Code (Metric)=3030, Current Rating=1.28A, DC Resistance (DCR)=228mR, Inductance=10uH, Max Operating Temperature=85°C, Min Operating Temperature=-40°C, Resistor Type=Wirewound, Saturation Current=810mA, Self Resonant Frequency=20MHz, Test Frequency=1MHz, Tolerance=20%, Case/Package=1212, Core Material=Ferrite, Mount="Surface Mount", Packaging="Tape and Reel", Shielding=Shielded
P1 P3 P4 P6: "Header, 18-Pin", LatestRevisionDate=17-Jul-2002, LatestRevisionNote="Re-released for DXP Platform.", Publisher="Altium Limited"
P2 P5: "Header, 18-Pin, Dual row", LatestRevisionDate=17-Jul-2002, LatestRevisionNote="Re-released for DXP Platform.", Publisher="Altium Limited"
P7 P8: "Header, 4-Pin, Dual row", LatestRevisionDate=17-Jul-2002, LatestRevisionNote="Re-released for DXP Platform.", Publisher="Altium Limited"
P9 P10: "Header, 8-Pin, Dual row", LatestRevisionDate=17-Jul-2002, LatestRevisionNote="Re-released for DXP Platform.", Publisher="Altium Limited"
P11 P12 P13 P14 P15 P16: "Header, 3-Pin, Dual row", LatestRevisionDate=17-Jul-2002, LatestRevisionNote="Re-released for DXP Platform.", Publisher="Altium Limited"
P17: "Header, 6-Pin", LatestRevisionDate=17-Jul-2002, LatestRevisionNote="Re-released for DXP Platform.", Publisher="Altium Limited"
P18: "Header, 7-Pin", LatestRevisionDate=17-Jul-2002, LatestRevisionNote="Re-released for DXP Platform.", Publisher="Altium Limited"
R1 R10 R11 R12 R19 R20 R21 R22 R30: library part CMP-1659-00013-4, "Chip Resistor, 10 KOhm, +/- 1%, 0.125 W, -55 to 155 degC, 0805 (2012 Metric), RoHS, Tape and Reel", Manufacturer=Yageo, Max Operating Temperature="155 degC", Min Operating Temperature="-55 degC", Package Quantity=5000, Voltage Rating="150 V", ComponentLink1Description="Manufacturer URL", ComponentLink1URL=http://www.yageo.com/, ComponentLink2Description=Datasheet, ComponentLink2URL=http://www.yageo.com/documents/recent/PYu-RC_Group_51_RoHS_L_04.pdf, DatasheetVersion="Rev. 4, 02/2016", Height="0.5 mm", Length="2 mm", Mount="Surface Mount", Mounting Technology="Surface Mount", PackageDescription="2-Pin Surface Mounted Device, Body 2 x 1.25 mm", PackageReference=0805, Packaging="Tape and Reel", Pins=2, REACH SVHC="No SVHC", RoHSCompliant=true
R2: library part CMP-2001-00152-1, Manufacturer=Panasonic, Part Number=ERJ-6ENF3653V
R3 R4: library part CMP-2001-00073-1, Manufacturer=Panasonic, Part Number=ERJ-6ENF2492V
R5: library part CMP-2001-00160-1, Manufacturer=Panasonic, Part Number=ERJ-6ENF3833V
R6 R8: library part CMP-07234-000021-1, "TRIMMER 100K OHM 0.25W SMD", Manufacturer=Bourns, Package=3269W, Power Rating=0.25W, Resistance=100kΩ, Temperature="-65°C to +150°C", Temperature Coefficient=100ppm/°C, Temperature Range High=+150°C, Temperature Range Low=-65°C, Tolerance=10%, Automotive=No, Category=Res, ComponentLink2Description=Datasheet, ComponentLink2URL=https://www.bourns.com/docs/Product-Datasheets/3269.pdf, Composition=Cermet, Device Class L1="Passive Components", Device Class L2=Resistors, Device Class L3="Variable Resistors and Potentiometers", Digikey Description="TRIMMER 100K OHM 0.25W SMD", Height=8.96mm, Lead Free=Yes, Manufacturer Part Number=3269W-1-104LF, Mouser Description="Res Cermet Trimmer 100K Ohm 10% 1/4W 12(Elec)Turn 1.78mm (6.35 X 6.36 X 8.46mm) Gull Wing SMD Tube", Octopart=https://octopart.com/3269w-1-104lf-bourns-114162, RoHS=TRUE, Series=3269
R7 R9: library part CMP-2001-00590-1, Manufacturer=Panasonic, Part Number=ERA6AEB123V
R13 R15 R16 R23 R24 R25: library part CMP-2001-00677-1, Manufacturer=Panasonic, Part Number=ERA6AEB913V
R14 R17 R18 R26 R27 R28: library part CMP-2001-00021-1, Manufacturer=Panasonic, Part Number=ERJ-6ENF1913V
R29: library part CMP-2100-03671-1, "Chip Resistor, 1 KOhm, +/- 1%, 125 mW, -55 to 155 degC, 0805 (2012 Metric), RoHS, Tape and Reel", Case Code (Imperial)=0805, Case Code (Metric)=2012, Manufacturer=Yageo, Max Operating Temperature=155degC, Max Power Dissipation=125mW, Min Operating Temperature=-55degC, Package Description="2-Pin Surface Mounted Device, Body 2 x 1.25 mm", Package Quantity=1, Resistance=1KOhm, Temperature Coefficient=100ppm/degreesC, Tolerance=1%, Voltage Rating=150V, Case/Package=0805, Composition=ThickFilm, Datasheet URL=http://www.yageo.com/NewPortal/yageodocoutput?fileName=/pdf/R-Chip/PYu-RC_Group_51_RoHS_L_5.pdf, Datasheet Version="Rev. 5, 10/2016", Depth=1.25mm, Height=0.024inch, Lead Free=LeadFree, Length=0.079inch, Manufacturer URL=http://www.yageo.com/, Military Standard=Not, Number of Pins=2, Number of Terminations=2, Package Reference=0805, Packaging=TapeandReel, Power Rating=125mW, REACH SVHC=Unknown, RoHSCompliant=true, Termination=SMD/SMT, Voltage Rating (DC)=150V, Width=0.049inch
SW1 SW2 SW3 SW4 SW5 SW6: "No Description Available", Mfr_Name="TE Connectivity", Copyright="Copyright (C) 2022 Ultra Librarian. All rights reserved.", Manufacturer_Part_Number=1825255-1, RefDes=RefDes, Type=DEV
U1: library part CMP-0188-00469-2, "2.7V 12-Bit A/D Converter with SPI Serial Interface, 8-Pin SOIC 150mil, C Performance Grade, Industrial Temperature", Code_IPC=SOIC127P600-8, Code_JEDEC=MS-012, ComponentLink1Description="Manufacturer URL", ComponentLink1URL=http://www.microchip.com/, ComponentLink2Description=Datasheet, ComponentLink2URL=http://ww1.microchip.com/downloads/en/DeviceDoc/21290F.pdf, ComponentLink3Description="Package Specification", ComponentLink3URL=http://www.microchip.com/stellent/groups/techpub_sg/documents/packagingspec/en012702.pdf, DatasheetVersion="revF, Aug-2011", PackageDescription="8-Lead Plastic Small Outline (SN) - Narrow, 3.90mm Body [SOIC]", PackageReference=SOIC-SN8, PackageVersion="revBB, Aug-2009", RevisionNote="URLs added. DatasheetVersion updated."
U2: library part CMP-0318-02011-2, "Octal 12-Bit Voltage Output Digital-to-Analog Converter, 2.5 to 5.5 V, -40 to +125 degC, RU-16, Pb-Free, Tube", Generic Part Number=AD5328, Manufacturer="Analog Devices", # DAC Outputs=8, Code_JEDEC=MO-153-AB, ComponentLink1Description="Manufacturer URL", ComponentLink1URL=http://www.analog.com/en/index.html, ComponentLink2Description=Datasheet, ComponentLink2URL=http://www.analog.com/static/imported-files/data_sheets/AD5308_5318_5328.pdf, ComponentLink3Description="Package Specification", ComponentLink3URL=http://www.analog.com/static/imported-files/packages/36244347913743854010197452789RU16.pdf, ComponentLink4Description="Product URL", ComponentLink4URL=http://www.analog.com/en/digital-to-analog-converters/da-converters/ad5328/products/product.html, DatasheetVersion=Rev.F, Max V+=5.5V, Mounting Technology="Surface Mount", Op Pwr Diss=5mW, PackageDescription="16-Lead Thin Shrink Small Outline Package [TSSOP]", PackageReference=RU-16, PackageVersion=Nov-2002, Packing=Tube, PartNumber=AD5328BRUZ, Resolution (Bits)=12, RevisionNote="Component URL fixed", RoHS=Y, Settling Time=6Âµs, Single Supply=Yes
U3: library part CMP-1679-00010-1, "Low-Dropout Positive Fixed Voltage Regulator, 1 A, 2.0 V Output Voltage, 0 to 125 degC, 4-Pin SOT-223 (318H-01), Pb-Free, Tape and Reel", Case Code (Imperial)=0603, Case Code (Metric)=1608, Max Operating Temperature="155 degC", Min Operating Temperature="-55 degC", Package Quantity=5000, Power Rating="100 mW", Resistance="220 kohm", Tolerance=1%, Type (Resistor)="Thick Film", Voltage Rating="75 V", Case\Package=0603, ComponentLink1Description="Manufacturer URL", ComponentLink1URL=http://www.onsemi.com/, ComponentLink2Description=Datasheet, ComponentLink2URL=http://www.onsemi.com/pub_link/Collateral/NCP1117-D.PDF, DatasheetVersion="Rev. 27, 09/2014", Height="0.45 mm", Length="1.55 mm", Mount="Surface Mount", PackageDescription="4-Pin Small Outline Transistor, Body 6.5 x 3.5 mm, Pitch 2.3 mm", PackageReference=SOT-223-4-318H-01_A, Packaging="Tape and Reel", Radiation Hardening=No, REACH SVHC=Unknown, RoHSCompliant=true, Weight="7.1E-05 oz", Width="0.85 mm"
U4: library part CMP-12153-000006-1, "IC REG LINEAR 3.3V 1.2A SOT223", Dropout Voltage=350mV, Manufacturer=STMicroelectronics, Max Junction Temp=+125°C, Max Supply Voltage=18V, Min Supply Voltage=2.6V, Nominal Supply Current=250uA, Output Current=2A, Output Voltage=3.3V, Package=SOT223-0046067, Temperature="-40°C to +125°C", Temperature Range Low=-40°C, Accuracy Percentage=2%, Automotive=No, Category=IC, ComponentLink2Description=Datasheet, ComponentLink2URL=https://www.st.com/resource/en/datasheet/ldl1117.pdf, Device Class L1="Integrated Circuits (ICs)", Device Class L2="Power Management ICs", Device Class L3="Voltage Regulators - Linear", Digikey Description="IC REG LINEAR 3.3V 1.2A SOT223", Height=1.9mm, Ipc Land Pattern Name=SOT230P700X190-4, Lead Free=Yes, Manufacturer Part Number=LDL1117S33R, Mouser Description="LDL1117 Series 1.2 A 3.3 V High PSRR LDO Linear Voltage Regulator-SOT-223", Number Of Outputs=1, Octopart=https://octopart.com/ldl1117s33r-stmicroelectronics-81876163, Output Type=Fixed, RoHS=TRUE, Standoff Height=0.02mm, Temperature Range High=+125°C
U5: library part CMP-12756-000040-1, "IC REG LIN 1V 600MA SOT223-3", Case/Package=SOT-223-3, Dropout Voltage=300mV, Max Input Voltage=6V, Max Operating Temperature=85°C, Max Output Current=600mA, Min Current Limit=800mA, Min Input Voltage=2V, Min Operating Temperature=-40°C, Output Voltage=3.3V, Package Quantity=2500, Quiescent Current=80uA, Accuracy=2%, Mount="Surface Mount", Number Of Outputs=1, Number of Pins=4, Number of Regulators=1, Output Current=600mA, Output Type=Fixed, Packaging="Tape and Reel", Polarity=Positive, Radiation Hardening=No, REACH SVHC="No SVHC", Weight=0.000282oz
U6: library part CMP-0478-00153-1, "Dual Micropower DC/DC Converter with Positive and Negative Outputs, 1.2 to 15 V Vin, 10-pin SOP (MS-10), -40 to 85 degC, Pb-Free", Manufacturer="Linear Technology", ComponentLink1Description="Manufacturer URL", ComponentLink1URL=http://www.linear.com/, ComponentLink2Description=Datasheet, ComponentLink2URL=http://cds.linear.com/docs/en/datasheet/1945fa.pdf, ComponentLink3Description="Package Specification", ComponentLink3URL=http://cds.linear.com/docs/en/packaging/05081661_F_MS.pdf, DatasheetVersion="Rev. A", Mounting Technology="Surface Mount", Number Of Outputs=2, PackageDescription="10-Pin Plastic MSOP, Body 3 x 3 mm, Pitch 0.5 mm", PackageReference=MS-10, PackageVersion="Rev. E, 06/2010", PartNumber=LT1945EMS#PBF, RoHS=TRUE, Vin Max(V)=15, Vin Min(V)=1.2
U7 U8 U10 U11 U12: library part CMP-09116-000003-2, "IC OPAMP ZERO-DRIFT 2 CIRC 8MSOP", Case/Package=MSOP, Input Bias Current=50pA, Input Offset Voltage (Vos)=1.5uV, Max Dual Supply Voltage=27.5V, Max Operating Temperature=125°C, Max Supply Voltage=55V, Min Dual Supply Voltage=2.25V, Min Operating Temperature=-40°C, Min Supply Voltage=4.5V, Operating Supply Current=830uA, Output Current per Channel=32mA, Power Supply Rejection Ratio (PSRR)=150dB, Voltage Gain=137dB, Common Mode Rejection Ratio=140dB, Gain Bandwidth Product=2.7MHz, Lead Free="Contains Lead", Mount="Surface Mount", Number of Pins=8, Packaging=Rail/Tube, Slew Rate=1.7V/µs
U9 U13: library part CMP-0798-00236-1, "1.8 to 5.5 V / +/-2.5 V, 4 Ohm, 32-Channel Analog Multiplexer, -40 to 85 degC, 48-pin QFP (SU-48), Reel", Manufacturer="Analog Devices", Bandwidth (Hz)=18M, Code_JEDEC=MS-026ABC, ComponentLink1Description="Manufacturer URL", ComponentLink1URL=http://www.analog.com/en/index.html, ComponentLink2Description=Datasheet, ComponentLink2URL=http://www.analog.com/static/imported-files/data_sheets/ADG726_732.pdf, ComponentLink3Description="Package Specification", ComponentLink3URL=http://www.analog.com/static/imported-files/packages/470644706845302410119987SU48_7x7.pdf, DatasheetVersion="Rev. 0", Max Analog Signal Range="Vss to Vdd", Mounting Technology="Surface Mount", PackageDescription="48-Pin Thin Plastic Quad Flat Package, Body 7 x 7 mm, Pitch 0.5 mm", PackageReference=SU-48, Packing=Reel, PartNumber=ADG732BSUZ-REEL, Ron (ohms)=4, Supply V Guar Performance="Dual_(+/-2.5V), Single_(+3V), Single_(+5V)", t transition (s)=23n

## Nets (pads, with @x,y where several pads share a name; then routed paths per layer and width w, separated by ;. In a path a pad name is that pad's centre, name@x,y a point inside that pad or via, vN(x,y) a via of type N, cw(c..) or ccw(c..) an arc to the next point about the centre after c; other vN are vias at no path point)
1V_REF: C11.1 J4.1 P18.2 R10.2 R11.2 R12.2 R20.2 R21.2 R22.2 SW1.3 SW2.3 SW3.3 SW4.3 SW5.3 SW6.3 U5.1 U8.3
2V_REF: C1.2 C4.1 C5.1 C7.1 J5.1 P7.1 P9.15 P10.16 P18.3 U3.2 U3.4
3.3V: C9.1 C26.1 C28.1 J3.1 P8.2 P9.5 P18.4 R1.2 R19.1 R30.1 U4.2 U4.4 U9.13 U9.14 U13.13 U13.14
5V: C6.1 C8.1 C10.1 C15.1 C27.2 L1.1 L2.1 P18.5 U3.3 U4.3 U5.3 U6.2 U6.4 U6.8 U8.8
!ADC_CS: P5.24 P6.7 P8.8
!DAC_CS: P5.16 P6.11 P9.3
!DRAIN_EN: P5.18 P6.10 R19.2 U9.22
!LDAC: P5.22 P6.8 P9.1 R1.1
!SOURCE_EN: P1.13 P2.11 R30.2 U13.22
+5V: P1.1 P2.35
+20V: C16.2 C17.2 C18.2 D3.1 J6.1 P18.7 R5.1 R6.2 U7.8
-20V: C13.1 C14.1 C19.2 D1.2 J7.1 P18.6 R2.2 R8.2 U7.4
DRAIN_SEL0: P1.6 P2.25 U9.15
DRAIN_SEL1: P1.5 P2.27 U9.16
DRAIN_SEL2: P1.7 P2.23 U9.17
DRAIN_SEL3: P5.26 P6.6 U9.18
DRAIN_SEL4: P5.20 P6.9 U9.19
GATE1: J1.1 J2.1 J10.1 P17.1 SW1.2
GATE2: J1.2 J2.2 J10.2 P17.2 SW6.2
GATE3: J1.3 J2.3 J10.3 P17.3 SW2.2
GATE4: J1.4 J2.4 J10.4 P17.4 SW4.2
GATE5: J1.5 J10.5 P17.5 SW3.2
GATE6: J1.6 J10.6 P17.6 SW5.2
GND: C1.1 C2.1 C3.1 C4.2 C5.2 C6.2 C7.2 C8.2 C9.2 C10.2 C11.2 C14.2 C15.2 C16.1 C18.1 C19.1 C20.1 C21.1 C22.1 C23.1 C24.1 C25.1 C26.2 C27.1 C28.2 D2.1 P1.2 P2.33 P7.5 P7.7 P10.6 P18.1 R3.1 R4.2 R7.1 R9.1 U3.1 U4.1 U5.2 U5.4 U6.3 U6.7 U6.9 U8.4 U9.20 U9.21 U9.23 U9.24 U13.20 U13.21 U13.23 U13.24
HI_THRES: C20.2 C21.2 C22.2 J8.1 U7.1 U7.2 U10.8 U11.8 U12.8
IDS: R29.1 U8.2 U13.43
IDS1: J1.39 J2.21 U13.12
IDS2: J1.40 J2.22 U13.11
IDS3: J1.41 J2.23 U13.10
IDS4: J1.42 J2.24 U13.9
IDS5: J1.43 J2.25 U13.8
IDS6: J1.44 J2.26 U13.7
IDS7: J1.45 J2.27 U13.6
IDS8: J1.46 J2.28 U13.5
IDS9: J1.47 J2.29 U13.4
IDS10: J1.48 J2.30 U13.3
IDS11: J1.49 J2.31 U13.2
IDS12: J1.50 J2.32 U13.1
IDS13: J1.51 J2.33 U13.48
IDS14: J1.52 J2.34 U13.47
IDS15: J1.53 J2.35 U13.46
IDS16: J1.54 J2.36 U13.45
IDS17: J1.55 U13.25
IDS18: J1.56 U13.26
IDS19: J1.57 U13.27
IDS20: J1.58 U13.28
IDS21: J1.59 U13.29
IDS22: J1.60 U13.30
IDS23: J1.61 U13.31
IDS24: J1.62 U13.32
IDS25: J1.63 U13.33
IDS26: J1.64 U13.34
IDS27: J1.65 U13.35
IDS28: J1.66 U13.36
IDS29: J1.67 U13.37
IDS30: J1.68 U13.38
IDS31: J1.69 U13.39
IDS32: J1.70 U13.40
LO_THRES: C23.2 C24.2 C25.2 J9.1 U7.6 U7.7 U10.4 U11.4 U12.4
MISO: P5.12 P6.13 P8.6
MOSI: P5.2 P6.18 P10.4
NetC12_1: C12.1 L1.2 U6.10
NetC12_2: C12.2 D1.1 D2.2
NetC13_2: C13.2 R2.1 R3.2 U6.1
NetC17_1: C17.1 R4.1 R5.2 U6.5
NetD3_2: D3.2 L2.2 U6.6
NetP1_3: P1.3 P2.31
NetP1_4: P1.4 P2.29
NetP1_11: P1.11 P2.15
NetP1_12: P1.12 P2.13
NetP1_15: P1.15 P2.7
NetP1_16: P1.16 P2.5
NetP1_17: P1.17 P2.3
NetP1_18: P1.18 P2.1
NetP2_2: P2.2 P3.18
NetP2_4: P2.4 P3.17
NetP2_6: P2.6 P3.16
NetP2_8: P2.8 P3.15
NetP2_10: P2.10 P3.14
NetP2_12: P2.12 P3.13
NetP2_14: P2.14 P3.12
NetP2_16: P2.16 P3.11
NetP2_18: P2.18 P3.10
NetP2_20: P2.20 P3.9
NetP2_22: P2.22 P3.8
NetP2_24: P2.24 P3.7
NetP2_26: P2.26 P3.6
NetP2_28: P2.28 P3.5
NetP2_30: P2.30 P3.4
NetP2_32: P2.32 P3.3
NetP2_34: P2.34 P3.2
NetP2_36: P2.36 P3.1
NetP4_1: P4.1 P5.35
NetP4_2: P4.2 P5.33
NetP4_3: P4.3 P5.31
NetP4_4: P4.4 P5.29
NetP4_5: P4.5 P5.27
NetP4_6: P4.6 P5.25
NetP4_7: P4.7 P5.23
NetP4_8: P4.8 P5.21
NetP4_9: P4.9 P5.19
NetP4_10: P4.10 P5.17
NetP4_11: P4.11 P5.15
NetP4_12: P4.12 P5.13
NetP4_13: P4.13 P5.11
NetP4_14: P4.14 P5.9
NetP4_15: P4.15 P5.7
NetP4_16: P4.16 P5.5
NetP4_17: P4.17 P5.3
NetP4_18: P4.18 P5.1
NetP5_6: P5.6 P6.16
NetP5_8: P5.8 P6.15
NetP5_28: P5.28 P6.5
NetP5_30: P5.30 P6.4
NetP5_32: P5.32 P6.3
NetP5_34: P5.34 P6.2
NetP5_36: P5.36 P6.1
NetP7_2: P7.2 U1.1
NetP7_4: P7.4 U1.2
NetP7_6: P7.6 U1.3
NetP7_8: P7.8 U1.4
NetP8_1: P8.1 U1.8
NetP8_3: P8.3 U1.7
NetP8_5: P8.5 U1.6
NetP8_7: P8.7 U1.5
NetP9_2: P9.2 U2.1
NetP9_4: P9.4 U2.2
NetP9_6: P9.6 U2.3
NetP9_8: P9.8 U2.4
NetP9_10: P9.10 U2.5
NetP9_12: P9.12 U2.6
NetP9_14: P9.14 U2.7
NetP9_16: P9.16 U2.8
NetP10_1: P10.1 U2.16
NetP10_3: P10.3 U2.15
NetP10_5: P10.5 U2.14
NetP10_7: P10.7 U2.13
NetP10_9: P10.9 U2.12
NetP10_11: P10.11 U2.11
NetP10_13: P10.13 U2.10
NetP10_15: P10.15 U2.9
NetP11_1: P11.1 P11.3 P11.5 R10.1 U10.2
NetP11_4: P11.4 R13.1
NetP11_6: P11.6 R14.1
NetP12_1: P12.1 P12.3 P12.5 R11.1 U11.2
NetP12_4: P12.4 R15.1
NetP12_6: P12.6 R17.1
NetP13_1: P13.1 P13.3 P13.5 R12.1 U12.2
NetP13_4: P13.4 R16.1
NetP13_6: P13.6 R18.1
NetP14_1: P14.1 P14.3 P14.5 R20.1 U12.6
NetP14_4: P14.4 R23.1
NetP14_6: P14.6 R26.1
NetP15_1: P15.1 P15.3 P15.5 R21.1 U10.6
NetP15_4: P15.4 R24.1
NetP15_6: P15.6 R27.1
NetP16_1: P16.1 P16.3 P16.5 R22.1 U11.6
NetP16_4: P16.4 R25.1
NetP16_6: P16.6 R28.1
NetR6_1: R6.1 R7.2 U7.3
NetR8_1: R8.1 R9.2 U7.5
SCK: P5.14 P6.12 P8.4 P10.2
SOURCE_SEL0: P5.10 P6.14 U13.15
SOURCE_SEL1: P5.4 P6.17 U13.16
SOURCE_SEL2: P1.10 P2.17 U13.17
SOURCE_SEL3: P1.9 P2.19 U13.18
SOURCE_SEL4: P1.8 P2.21 U13.19
VDS1: J1.7 J2.5 U9.12
VDS2: J1.8 J2.6 U9.11
VDS3: J1.9 J2.7 U9.10
VDS4: J1.10 J2.8 U9.9
VDS5: J1.11 J2.9 U9.8
VDS6: J1.12 J2.10 U9.7
VDS7: J1.13 J2.11 U9.6
VDS8: J1.14 J2.12 U9.5
VDS9: J1.15 J2.13 U9.4
VDS10: J1.16 J2.14 U9.3
VDS11: J1.17 J2.15 U9.2
VDS12: J1.18 J2.16 U9.1
VDS13: J1.19 J2.17 U9.48
VDS14: J1.20 J2.18 U9.47
VDS15: J1.21 J2.19 U9.46
VDS16: J1.22 J2.20 U9.45
VDS17: J1.23 U9.25
VDS18: J1.24 U9.26
VDS19: J1.25 U9.27
VDS20: J1.26 U9.28
VDS21: J1.27 U9.29
VDS22: J1.28 U9.30
VDS23: J1.29 U9.31
VDS24: J1.30 U9.32
VDS25: J1.31 U9.33
VDS26: J1.32 U9.34
VDS27: J1.33 U9.35
VDS28: J1.34 U9.36
VDS29: J1.35 U9.37
VDS30: J1.36 U9.38
VDS31: J1.37 U9.39
VDS32: J1.38 U9.40
VDS_BUFF: U8.6 U8.7 U9.43
VDS_RAW: P10.14 U8.5
VGS1: P11.2 R13.2 R14.2 U10.1
VGS2: P15.2 R24.2 R27.2 SW6.1 U10.7
VGS3: P12.2 R15.2 R17.2 U11.1
VGS4: P16.2 R25.2 R28.2 SW4.1 U11.7
VGS5: P13.2 R16.2 R18.2 U12.1
VGS6: P14.2 R23.2 R26.2 U12.7
VGS_RAW1: P9.7 U10.3
VGS_RAW2: P9.9 U10.5
VGS_RAW3: P9.11 U11.3
VGS_RAW4: P9.13 U11.5
VGS_RAW5: P10.12 U12.3
VGS_RAW6: P10.10 U12.5
VMEAS: P1.14 P2.9 P7.3 R29.2 U8.1
pads on no net: C2.2 C3.2 J1.71 J1.72 J2.MP1 J2.MP2 J10.7 J10.8 P10.8 R6.3 R8.3 SW1.1 SW1.4 SW1.5 SW2.1 SW2.4 SW2.5 SW3.1 SW3.4 SW3.5 SW4.4 SW4.5 SW5.1 SW5.4 SW5.5 SW6.4 SW6.5 U9.41 U9.42 U9.44 U13.41 U13.42 U13.44

## Text inside footprints (layer, text, board x,y; h text height)
P2: Top Overlay "36" at 10602,5245 h50 r90; Top Overlay "35" at 10702,5245 h50 r90; Top Overlay "1" at 10702,3385 h50 r90; Top Overlay "2" at 10602,3365 h50 r90
P5: Top Overlay "36" at 11200,5245 h50 r90; Top Overlay "35" at 11300,5245 h50 r90; Top Overlay "1" at 11300,3385 h50 r90; Top Overlay "2" at 11200,3365 h50 r90
P7: Top Overlay "2" at 8914,4835 h50 r90; Top Overlay "1" at 9014,4855 h50 r90; Top Overlay "7" at 9014,5295 h50 r90; Top Overlay "8" at 8914,5295 h50 r90
P8: Top Overlay "2" at 9172,4835 h50 r90; Top Overlay "1" at 9272,4855 h50 r90; Top Overlay "7" at 9272,5295 h50 r90; Top Overlay "8" at 9172,5295 h50 r90
P9: Top Overlay "2" at 8216,4394 h50 r90; Top Overlay "1" at 8316,4394 h50 r90; Top Overlay "15" at 8316,5254 h50 r90; Top Overlay "16" at 8216,5254 h50 r90
P10: Top Overlay "2" at 8474,4394 h50 r90; Top Overlay "1" at 8574,4394 h50 r90; Top Overlay "15" at 8574,5254 h50 r90; Top Overlay "16" at 8474,5254 h50 r90
P11: Top Overlay "6" at 14695,7226 h50 r90; Top Overlay "5" at 14795,7226 h50 r90; Top Overlay "2" at 14695,6866 h50 r90; Top Overlay "1" at 14795,6886 h50 r90
P12: Top Overlay "6" at 14437,7226 h50 r90; Top Overlay "5" at 14537,7226 h50 r90; Top Overlay "2" at 14437,6866 h50 r90; Top Overlay "1" at 14537,6886 h50 r90
P13: Top Overlay "6" at 13960,7226 h50 r90; Top Overlay "5" at 14060,7226 h50 r90; Top Overlay "2" at 13960,6866 h50 r90; Top Overlay "1" at 14060,6886 h50 r90
P14: Top Overlay "6" at 9602,7226 h50 r90; Top Overlay "5" at 9702,7226 h50 r90; Top Overlay "2" at 9602,6866 h50 r90; Top Overlay "1" at 9702,6886 h50 r90
P15: Top Overlay "6" at 9087,7226 h50 r90; Top Overlay "5" at 9187,7226 h50 r90; Top Overlay "2" at 9087,6866 h50 r90; Top Overlay "1" at 9187,6886 h50 r90
P16: Top Overlay "6" at 9345,7226 h50 r90; Top Overlay "5" at 9445,7226 h50 r90; Top Overlay "2" at 9345,6866 h50 r90; Top Overlay "1" at 9445,6886 h50 r90